# Altium PCB NBP8 Xilinx Virtex-II Pro BGA456 Rev1.01.PcbDoc (part 2 of 4)
Units mm, origin at the board's own origin, x right, y up, seen from the top; angles counter-clockwise.
Board outline 69 x 99.5 mm, 8 copper layers (Top Layer, InternalPlane1, InternalPlane2, MidLayer1, MidLayer2, MidLayer3, MidLayer4, Bottom Layer), stack 1.545 mm thick; 164 components, 314 nets, 1132 pads, 807 vias.
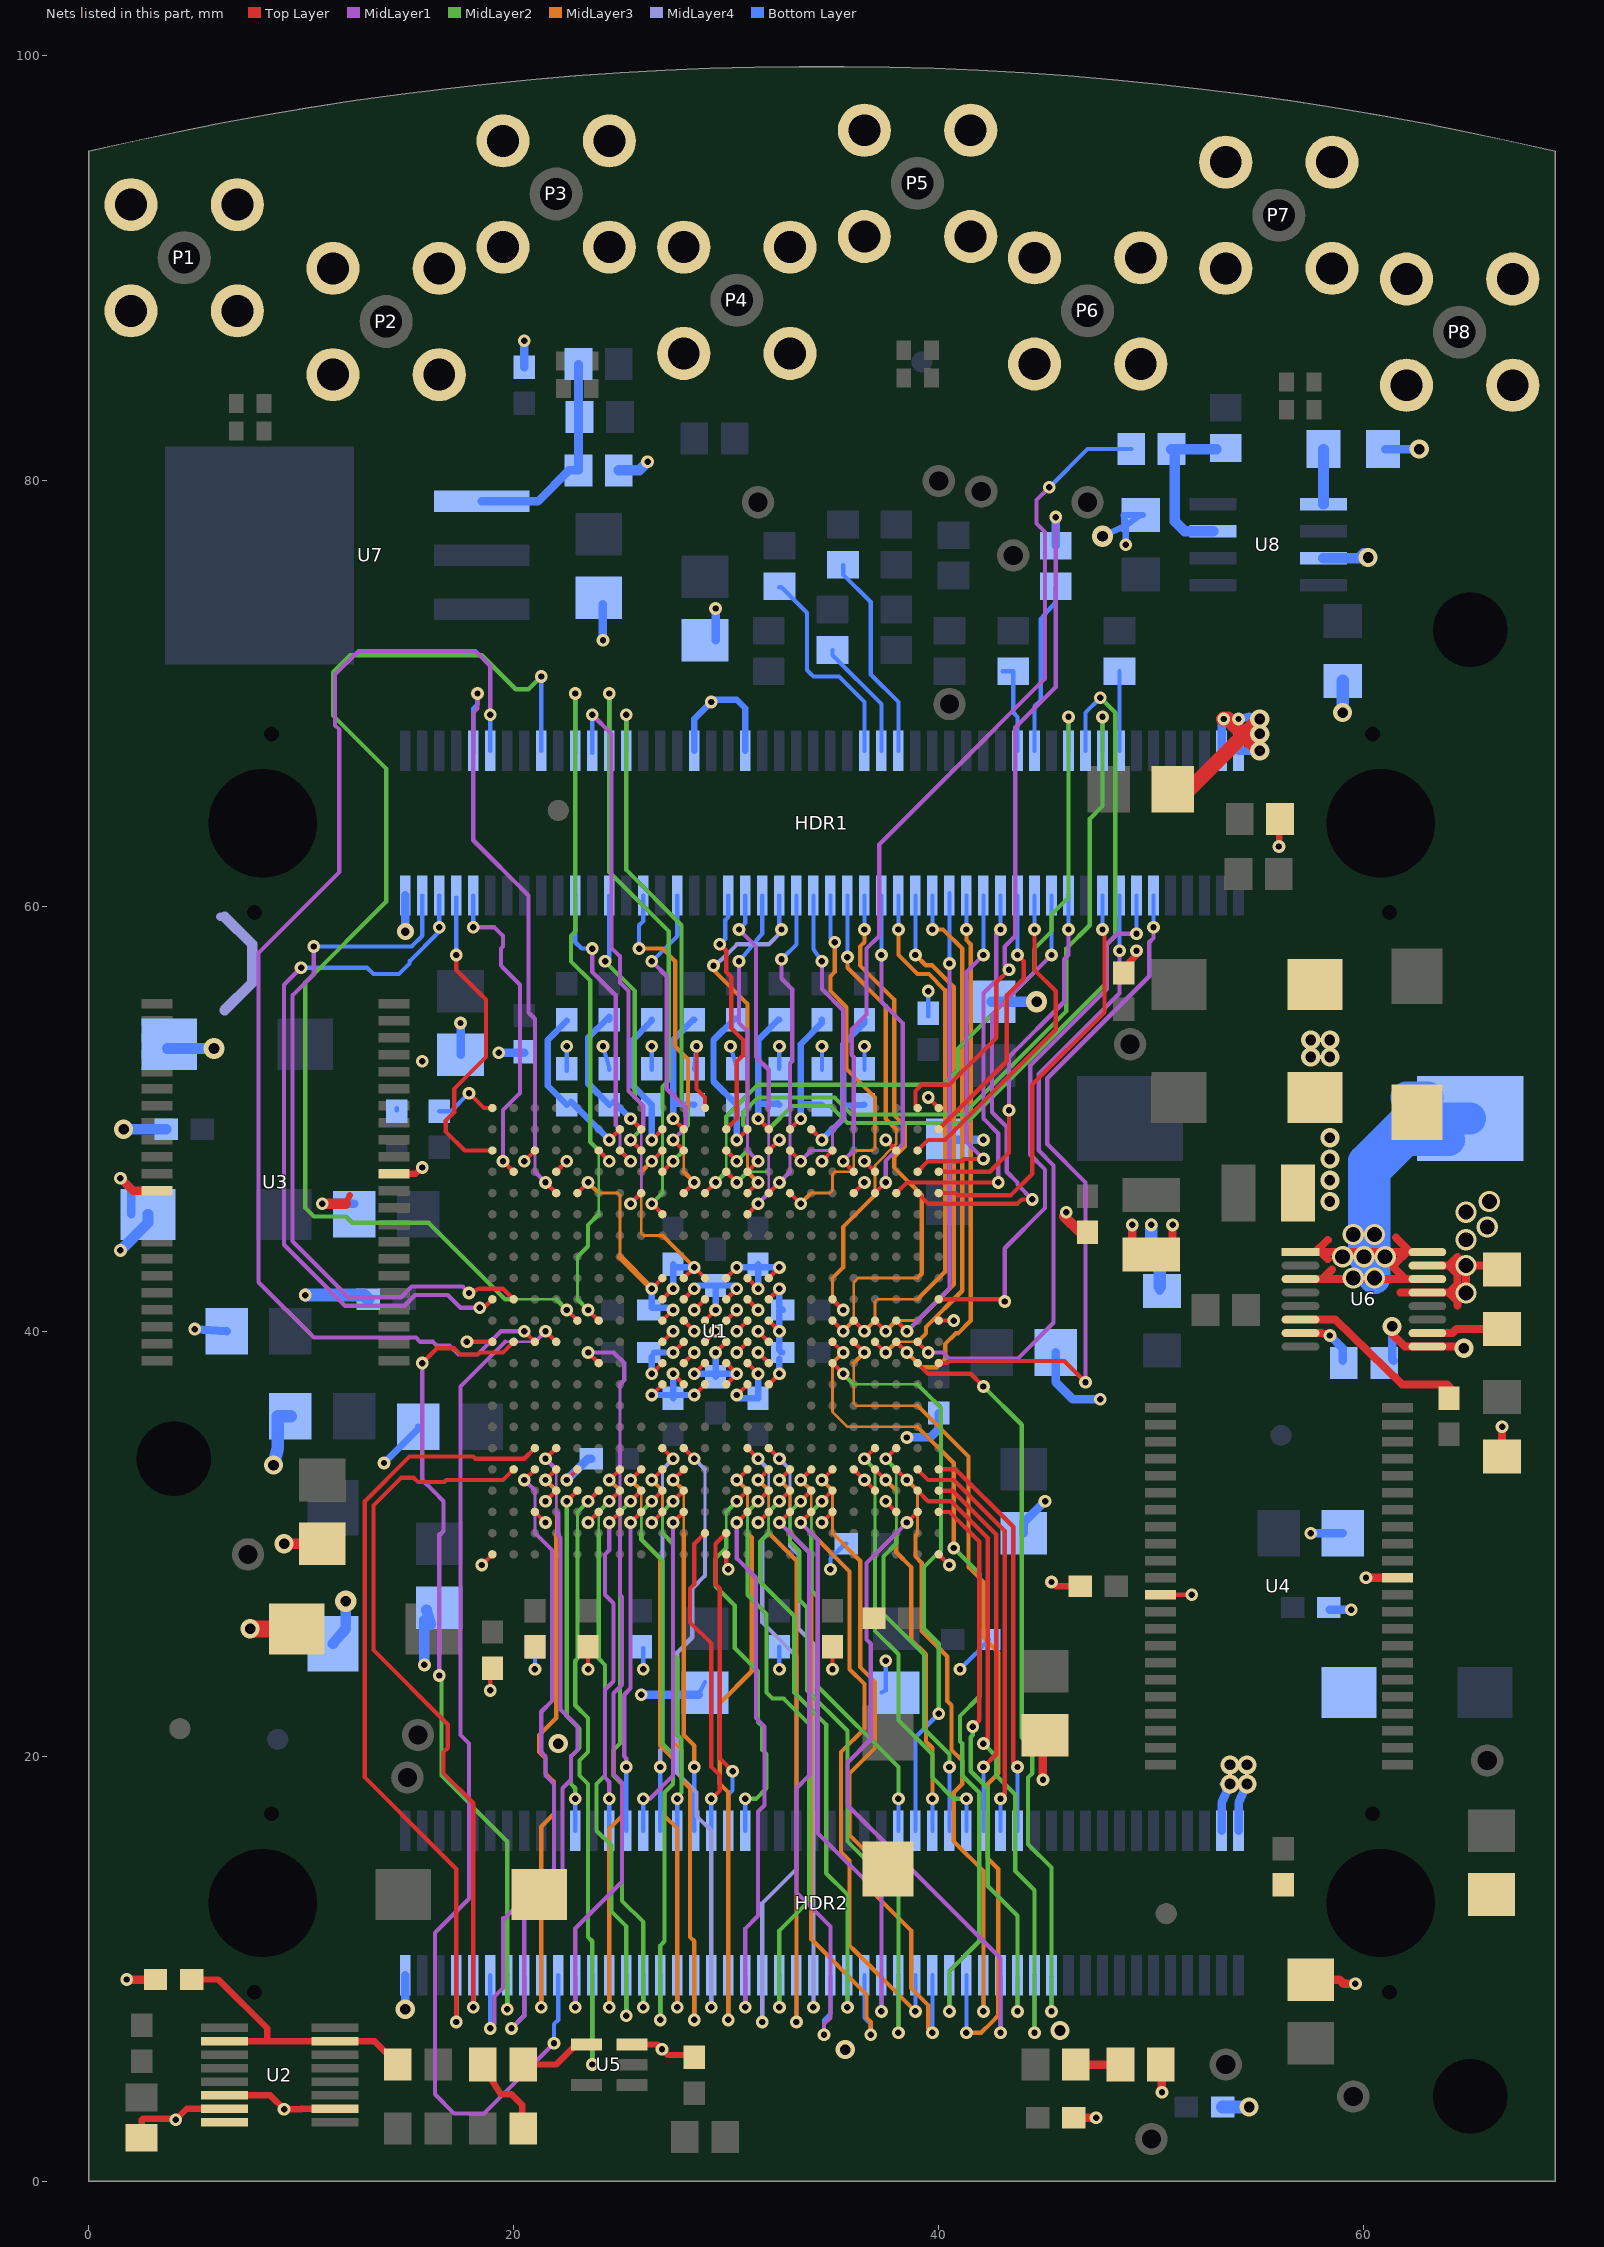
[diagram p8: the nets of this part, all layers, seen from the top]

## Via types
v1: diameter 0.6, hole 0.3, Top Layer to Bottom Layer, tented bottom, 695 vias
v2: diameter 0.9, hole 0.5, Top Layer to Bottom Layer, tented bottom, 45 vias
v3: diameter 1.8, hole 1, Top Layer to Bottom Layer, tented bottom, 26 vias
v4: diameter 1, hole 0.7, Top Layer to Bottom Layer, tented bottom, 17 vias
v5: diameter 1, hole 0.5, Top Layer to Bottom Layer, tented bottom, 15 vias
v6: diameter 1.5, hole 1, Top Layer to Bottom Layer, tented bottom, 4 vias
v7: diameter 0.8, hole 0.4, Top Layer to Bottom Layer, tented bottom, 3 vias
v8: diameter 0.9, hole 0.5, Top Layer to Bottom Layer, 2 vias

## Nets (pads, with @x,y where several pads share a name; then routed paths per layer and width w, separated by ;. In a path a pad name is that pad's centre, name@x,y a point inside that pad or via, vN(x,y) a via of type N, cw(c..) or ccw(c..) an arc to the next point about the centre after c; other vN are vias at no path point) (continued)
GND: C1.2 C2.2 C3.2 C4.2 C5.2 C6.2 C7.2 C9.2 C10.2 C11.2 C12.2 C13.2 C14.2 C15.2 C16.2 C17.2 C18.2 C19.2 C20.2 C21.2 C22.2 C23.2 C24.2 C25.2 C26.2 C27.2 C28.2 C29.2 C30.2 C31.2 C32.1 C33.2 C34.2 C35.2 C36.2 C37.2 C38.2 C39.2 C40.2 C41.2 C42.2 C43.2 C44.2 C45.2 C46.2 C47.2 C48.2 C49.2 C50.2 C51.2 C52.2 C53.2 C54.2 C55.2 C56.2 C57.2 C58.2 C59.2 C60.2 C61.2 C62.1 C63.1 C65.1 C66.1 C67.2 C76.2 C77.2 C78.2 C79.2 C80.1 C81.1 C82.1 C83.1 C84.1 C85.1 C86.1 C87.1 C88.2 C89.2 C90.2 C91.2 C92.1 C93.1 C94.2 HDR1.1 HDR1.36 HDR1.42 HDR1.98 HDR1.100 HDR2.1 HDR2.98 HDR2.100 LED1.2 P1.2 P2.2 P3.2 P4.2 P5.2 P6.2 P7.2 P8.2 R16.2 R18.1 R22.1 R25.2 U1.A1 U1.A11 U1.A22 U1.AB1 U1.AB12 U1.AB22 U1.C3 U1.C6 U1.C9 U1.C14 U1.C17 U1.C20 U1.D4 U1.D19 U1.E5 U1.E18 U1.J9 U1.J10 U1.J11 U1.J12 U1.J13 U1.J14 U1.K9 U1.K10 U1.K11 U1.K12 U1.K13 U1.K14 U1.L9 U1.L10 U1.L11 U1.L12 U1.L13 U1.L14 U1.L22 U1.M1 U1.M9 U1.M10 U1.M11 U1.M12 U1.M13 U1.M14 U1.N9 U1.N10 U1.N11 U1.N12 U1.N13 U1.N14 U1.P9 U1.P10 U1.P11 U1.P12 U1.P13 U1.P14 U1.V5 U1.V18 U1.W4 U1.W19 U1.Y3 U1.Y6 U1.Y9 U1.Y14 U1.Y17 U1.Y20 U2.6 U2.7 U2.8 U2.10 U3.12 U3.34 U4.12 U4.34 U5.3 U6.9 U6.13 U6.15 U8.3 | length 275.5
  Top Layer w0.2: v1(17.8,39.5) 18.8,39.5 U1.L22@19,39.5 ; v1(17.9,51.2) 18.6,50.5 U1.AB22@19,50.5 ; v1(18.5,29) U1.A22@19,29.5 ; v1(18.9,23.1) 18.9,24.15 C33.2@18.9,24.2 ; v1(20.5,48) U1.Y20@21,48.5 ; U1.C20@21,31.5 v1(21.5,31) ; v1(21.5,32) U1.D19@22,32.5 ; U1.W19@22,47.5 v1(22.5,48) ; v1(22.5,33) U1.E18@23,33.5 ; U1.V18@23,46.5 v1(23.5,47) ; v1(23.5,24.1) C78.2@23.5,25.15 ; v1(23.5,31) U1.C17@24,31.5 ; U1.Y17@24,48.5 v1(24.5,48) ; v1(26.5,31) U1.C14@27,31.5 ; v1(26.5,37) U1.J14@27,37.5 ; v1(26.5,38) U1.K14@27,38.5 ; v1(26.5,42) U1.P14@27,42.5 ; v1(26.5,48) U1.Y14@27,48.5 ; U1.L14@27,39.5 v1(27.5,40) ; U1.M14@27,40.5 v1(27.5,41) ; U1.N14@27,41.5 v1(27.5,42) ; v1(27.5,38) U1.J13@28,37.5 ; v1(27.5,39) U1.L13@28,39.5 ; U1.K13@28,38.5 v1(28.5,39) ; U1.M13@28,40.5 v1(28.5,40) ; U1.N13@28,41.5 v1(28.5,42) ; U1.P13@28,42.5 v1(28.5,43) U1.P12@29,42.5 ; v1(28.5,37) U1.J12@29,37.5 ; v1(28.5,38) U1.K12@29,38.5 ; v1(28.5,41) U1.N12@29,41.5 ; v1(28.6,53.4) 28.6,51.4 29,51 U1.AB12@29,50.5 ; U1.L12@29,39.5 v1(29.5,40) ; U1.M12@29,40.5 v1(29.5,41) ; v1(29.5,39) U1.L11@30,39.5 ; U1.A11@30,29.5 30,29.1 v1(30.1,28.8) ; U1.J11@30,37.5 v1(30.5,38) U1.K11@30,38.5 ; U1.M11@30,40.5 v1(30.5,41) ; U1.N11@30,41.5 v1(30.5,42) ; U1.P11@30,42.5 v1(30.5,43) ; v1(30.5,37) U1.J10@31,37.5 ; v1(30.5,39) U1.L10@31,39.5 ; v1(30.5,40) U1.M10@31,40.5 ; U1.K10@31,38.5 v1(31.5,38) ; U1.N10@31,41.5 v1(31.5,41) ; U1.P10@31,42.5 v1(31.5,42) ; v1(31.5,31) U1.C9@32,31.5 ; v1(31.5,39) U1.K9@32,38.5 ; v1(31.5,40) U1.L9@32,39.5 ; U1.J9@32,37.5 v1(32.5,38) ; U1.M9@32,40.5 v1(32.5,40) ; U1.N9@32,41.5 v1(32.5,42) ; U1.P9@32,42.5 v1(32.5,43) ; U1.Y9@32,48.5 v1(32.5,49) ; v1(34.5,31) U1.C6@35,31.5 ; v1(34.5,48) U1.Y6@35,48.5 ; v1(35,24.1) C79.2@35,25.15 ; U1.E5@36,33.5 v1(36.5,33) U1.D4@37,32.5 ; U1.V5@36,46.5 v1(36.5,47) ; v1(36.5,48) U1.W4@37,47.5 ; v1(37.5,32) U1.C3@38,31.5 ; v1(37.5,49) U1.Y3@38,48.5 ; v1(39.5,51) U1.AB1@40,50.5 ; U1.A1@40,29.5 v1(40.5,29) ; U1.M1@40,40.5 v1(40.7,40.5) ; C44.2@44.9,20.9 C44.2@45,21 ; U4.12@50.5,27.6 v1(51.9,27.6)
  Top Layer w0.3: R18.1@2.5,2.05 2.5,2.9 2.55,2.95 4.05,2.95 v1(4.1,2.9) 4.613,3.413 U2.7@6.4,3.413 ; U2.6@6.4,4.048 8.553,4.048 v1(9.2,3.4) 10,3.4 10.012,3.413 U2.10@11.6,3.413 ; 12.1,46 12.287,46.4 ; U3.34@14.375,47.4 15.4,47.4 v1(15.7,47.7) ; U5.3@25.57,6.441 26.759,6.441 v1(26.978,6.222) 27.25,5.95 C35.2@28.5,5.95 ; v1(45.3,28.2) 45.5,28 C27.2@46.65,28 ; C22.2@48.7,56.85 48.5,56.9 48.575,56.975 49.3,57.7 v1(49.3,57.9) ; v1(56,62.8) R16.2@56.05,64.1
  Top Layer w0.38: C62.1@49.1,43.8 v1(49.1,45) ; C62.1@51,43.9 v1(51,45) ; v2@61.3,40.2 61.3,39.9 61.922,39.278 U6.9@62.984,39.278 v2@64.622,39.278 ; 61.717,41.818 U6.13@62.984,41.818 64,41.818 ; U6.15@62.984,43.088 63.988,43.088 ; 64.4,41.2 64.4,41.417 ; C67.2@66.487,43.088 v4(64.8,43.088) ; C65.1@66.5,34.1 v1(66.5,35.5) ; 63.988,43.088 64.394,42.681 64.4,42.675 ; 63.988,43.088 64.394,43.494 64.4,43.5 v4@64.4,43.088 ; 63.988,43.088 v4@64.4,43.088 ; 64,41.818 64.4,41.417 ; 64,41.818 64.018,41.818 ; 64.018,41.818 v4@64.4,41.818 ; 64.018,41.818 64.4,42.2 ; 64.4,41.417 64.4,41.8 v4@64.4,41.818 ; v4@64.4,41.818 64.4,42.2 ; v4@64.4,41.818 64.518,41.818 64.65,41.95 64.8,42.1 v4(64.8,43.088) ; 64.4,42.2 64.4,42.675 ; 64.4,42.675 v4@64.4,43.088 ; v4@64.4,43.088 v4(64.8,43.088)
  Top Layer w0.4: v1(1.5,47.2) 2.1,46.6 U3.12@3.225,46.6 ; v1(1.8,9.5) C32.1@3.15,9.5 ; v1(44.9,18.9) C44.2@44.9,20.9 ; C13.2@46.4,3 v1(47.4,3) ; v1(50.5,4.2) LED1.2@50.5,5.5 ; C60.2@57.5,9.5 58.85,9.5 59.05,9.3 v1(59.6,9.3) ; v1(60.1,28.4) U4.34@61.575,28.4
  Top Layer w0.5: v2(9.2,30) C46.2@11,30 ; v1(11,46) 12.1,46 ; v1(46,45.6) 45.9,45.4 46.65,44.65 C25.2@47,44.65
  Top Layer w0.7: C90.2@51.5,65.4 51.7,65.4 54.35,68.05 ; v1(53.4,68.8) 53.6,68.8 53.85,68.55 54.35,68.05 ; v2(55.1,67.3) 54.7,67.7 54.35,68.05 ; v2(55.1,68.8) 54.75,68.45 54.35,68.05
  Top Layer w0.8: v2(7.6,26) C51.2@9.8,26
  MidLayer3 w0.127: 24,46.5 24.9,46.5 25,46.4 25,43.5 ; 26,47.5 26,44.6 26.1,44.5 27,44.5
  MidLayer3 w0.2: v1(23.5,47) 24,46.5 ; 26,47.5 v1(26.5,48) ; 27,44.5 v1(28.5,43)
  MidLayer3 w0.3: 25,43.5 v1(26.5,42)
  MidLayer4 w0.4: 6.2,59.5 6.4,59.5
  MidLayer4 w0.5: 6.4,55.1 7.7,56.4 7.7,58.2 6.4,59.5
  Bottom Layer w0.2: C34.2@14.5,50.4 C34.2@14.5,50.5 ; C4.2@16.5,50.35 17.05,50.35 v1(17.9,51.2) ; v1(21,24.1) C1.2@21,25.15 ; C81.1@22.5,52.25 C81.1@22.5,52.35 v1(22.5,53.4) ; v1(24.2,53.4) C80.1@24.5,52.35 C80.1@24.5,52.3 ; v1(26.1,24.1) C3.2@26.1,25.1 ; C82.1@26.5,52.3 C82.1@26.5,52.35 v1(26.5,53.4) ; C83.1@28.5,52.3 C83.1@28.5,52.35 v1(28.6,53.4) ; C37.2@28.7,22.9 28.8,23.1 C37.2@29,23.5 ; v1(30.2,53.4) C86.1@30.5,52.35 C86.1@30.5,52.3 ; v1(32.5,24.1) C6.2@32.5,25.15 ; C87.1@32.5,52.35 v1(32.5,53.4) ; C85.1@34.5,52.3 C85.1@34.5,52.35 v1(34.5,53.4) ; v1(34.9,28.8) 34.9,29.3 35.6,30 C23.2@35.65,30 ; C84.1@36.5,52.3 C84.1@36.5,52.35 v1(36.5,53.4) ; C48.2@37.3,23 37.5,23.1 v1(37.5,24.5) ; C5.2@39.5,54.8 C5.2@39.5,54.95 v1(39.5,56) ; v1(41,24.1) 41.7,24.8 C2.2@42.35,25.5 ; v2@53.3,18.7 v2(53.7,18.7) ; HDR2.100@54.1,16.4 HDR2.100@54.1,16.5
  Bottom Layer w0.3: v1(13.9,33.8) 15.5,35.4 C50.2@15.5,35.5 ; v1(26.5,37) C21.2@27.5,37 ; v1(26.5,38) C14.2@26.5,38.8 ; v1(26.5,42) 26.5,41.1 27.4,41.1 v1(27.5,41) ; C14.2@26.6,39 v1(27.5,39) ; C21.2@27.5,36.85 C21.2@27.5,37 ; v1(27.5,38) C21.2@27.5,37 ; v1(27.5,42) C19.2@27.5,43.15 ; C19.2@27.6,43 v1(28.5,43) ; v1(28.5,37) C21.2@27.5,37 ; v1(28.5,38) C12.2@29.4,38 ; v1(28.5,42) 28.65,42.15 C10.2@29.5,42.15 ; HDR1.36@28.5,67.3 28.5,68.8 v1(29.3,69.6) 29.4,69.7 30.5,69.7 30.9,69.3 HDR1.42@30.9,67.3 ; C12.2@29.5,37.85 C12.2@29.5,38 ; v1(29.5,39) C12.2@29.5,38 ; v1(29.5,41) C10.2@29.5,42.15 ; v1(30.5,37) 30.65,36.85 C20.2@31.5,36.85 v1(31.5,38) ; v1(30.5,38) C12.2@29.5,38 ; v1(30.5,42) 30.35,42.15 C10.2@29.5,42.15 ; v1(30.5,43) C18.2@31.5,43 ; v1(31.5,42) C18.2@31.5,43 ; C18.2@31.5,43.15 C18.2@31.5,43 ; v1(32.5,38) C9.2@32.5,38.7 ; C16.2@32.5,41 v1(32.5,40) 32.5,39.1 32.6,39 C9.2@32.65,39 ; v1(32.5,42) 32.5,41.15 C16.2@32.65,41 ; v1(32.5,43) C18.2@31.5,43 ; v5(47.7,77.4) C92.1@48.8,77.9 ; v1(48.8,77) C92.1@48.8,77.9 ; C92.1@49.6,78.4 C92.1@49.5,78.4 ; C92.1@48.8,77.9 48.731,78.246 48.7,78.4 C92.1@49.5,78.4 ; C92.1@48.8,77.9 C92.1@49.5,78.4
  Bottom Layer w0.4: v1(1.5,47.2) 2,46.7 C56.2@2,45.5 ; v1(5,40.1) C47.2@6.5,40 ; v1(10.2,41.7) 11.6,41.7 ; v1(11,46) C41.2@12.5,46 ; v2@14.9,8.2 HDR2.1@14.9,9.7 ; v7(14.9,58.8) HDR1.1@14.9,60.5 ; C89.2@17.5,53 v1(17.5,54.5) ; v1(19.3,53.1) C77.2@20.5,53.1 ; C17.2@20.5,85.35 v1(20.5,86.6) ; v1(22.5,33) 23.5,34 C24.2@23.65,34 ; v1(24.2,72.5) C59.2@24.2,74.2 ; v1(26,22.9) C37.2@28.7,22.9 ; C45.2@29.5,72.5 v1(29.5,74) ; v1(38.5,35) 39.6,35 40,35.4 C7.2@40,36.15 ; C43.2@40.5,49 v1(42.1,49) ; C40.2@44,30.5 44,31 v1(45,32) ; C39.2@45.5,39 45.5,37.6 46.3,36.8 v1(47.6,36.8) ; 50,43.9 50.4,43.5 C66.1@50.4,41.9 ; HDR2.98@53.3,16.5 53.3,17.8 v2(53.7,18.7) ; HDR1.98@53.3,67.3 53.3,68.6 53.45,68.75 53.6,68.9 v1(54.1,68.8) ; HDR2.100@54.1,16.5 54.1,17.8 v2(54.5,18.7) ; v2(55.1,67.3) HDR1.100@54.1,67.3 v1(54.1,68.8) ; v2(55.1,68.1) 54.785,68.603 54.74,68.675 54.6,68.9 v1(54.1,68.8) ; v1(57.5,30.5) C49.2@59,30.5 ; C15.2@58.4,26.9 v1(59.4,26.9) ; C94.2@61,81.5 v2(62.6,81.5) ; v2(61.329,40.229) 61.329,38.671 R22.1@61.4,38.6
  Bottom Layer w0.5: v1(1.5,43.8) 2.8,45.1 C56.2@2.8,45.5 ; v2(1.65,49.5) 3.3,49.5 C26.2@3.65,49.5 ; C91.2@3.7,53.3 3.8,53.3 v5(5.9,53.3) ; C54.2@11.5,25.3 12.1,26 v5(12.1,27.3) ; v1(15.8,24.3) 15.8,26.4 16.008,26.262 16.1,26.2 15.919,26.834 C42.2@15.9,26.9 ; R25.2@24.95,80.5 25.9,80.5 v1(26.3,80.9) ; C38.2@42.5,55.5 v5(44.6,55.5) ; U8.3@58.1,76.365 59.765,76.365 60,76.6 v2(60.2,76.4)
  Bottom Layer w0.6: v2(8.7,33.7) 8.9,34.5 8.9,36 C36.2@9.5,36 ; v1(10.2,41.7) 12.95,41.7 C29.2@13.15,41.5 ; v1(50,45) 50,43.9 50.4,43.5 C66.1@50.4,42.1 ; C28.2@53.35,3.5 v2(54.6,3.5) ; v2(59,69.1) C93.1@59,70.6
  other v1: 15.7,52.7
  other v2: 35.6,6.2 45.7,7.1 14.9,8.1 53.7,19.6 54.5,19.6 22.1,20.6 64.7,39.2 58.4,46.1 58.4,47.1 58.4,48.1 58.4,49.1 57.5,52.9 58.4,52.9 57.5,53.7 58.4,53.7
  other v4: 64.8,41.8 64.8,44.3 65.8,44.9 64.8,45.6 65.9,46.1
GREEN0: HDR1.10 U1.V19 | length 28.1
  Top Layer w0.2: v1(21.5,47) U1.V19@22,46.5
  MidLayer1 w0.127: 21,47.5 21,48.5
  MidLayer1 w0.2: v1(18.3,70) 18.3,69.3 18.1,69.1 18.1,63.1 20.7,60.5 20.7,55 21,54.7 21,48.5 ; 21,47.5 v1(21.5,47)
  Bottom Layer w0.2: HDR1.10@18.1,67.2 HDR1.10@18.1,67.3 18.1,69.3 18.3,69.5 v1(18.3,70)
GREEN1: HDR1.12 U1.L20 | length 57.4
  Top Layer w0.2: v1(20.5,40) U1.L20@21,39.5
  MidLayer1 w0.2: v1(18.9,69) 18.9,71.3 18.2,72 12.7,72 11.6,70.9 11.6,68.5 11.8,68.3 11.8,61.6 8,57.8 8,42.3 10.6,39.7 15.4,39.7 15.6,39.5 16.2,39.5 16.386,39.314 16.986,39.314 17.4,38.9 18.3,38.9 19.4,40 v1(20.5,40)
  Bottom Layer w0.2: HDR1.12@18.9,67.3 v1(18.9,69)
HDRIVE: HDR1.18 U1.M18 | length 57.3
  Top Layer w0.2: v1(22.5,41) U1.M18@23,40.5
  MidLayer2 w0.127: 20,41.5 22,41.5
  MidLayer2 w0.2: 20,41.5 19.6,41.5 16,45.1 12.4,45.1 12.1,45.4 10.6,45.4 10.2,45.8 10.2,56.4 14,60.2 14,66.466 11.5,68.966 11.5,71 12.1,71.6 12.3,71.8 18.5,71.8 20.1,70.2 20.7,70.2 v1(21.3,70.8) ; 22,41.5 v1(22.5,41)
  Bottom Layer w0.2: HDR1.18@21.3,67.3 21.3,70 v1(21.3,70.8)
IO0: HDR2.7 U1.F20 | length 37.6
  Top Layer w0.2: v1(17.3,7.5) 17.3,14.7 16.379,15.621 13,19 13,32 15.1,34.1 18.1,34.1 18.2,34 20.5,34 U1.F20@21,34.5
  Bottom Layer w0.2: v1(17.3,7.5) HDR2.7@17.3,9.7
IO1: HDR2.9 U1.E21 | length 34.7
  Top Layer w0.2: v1(18.1,8.2) 18.1,17.8 16.7,19.2 16.7,20.2 16.9,20.4 16.9,21.5 13.4,25 13.4,31.8 14.7,33.1 15.3,33.1 15.5,32.9 16.732,32.9 16.832,33 19.5,33 U1.E21@20,33.5
  Bottom Layer w0.2: v1(18.1,8.2) HDR2.9@18.1,9.7
IO2: HDR2.11 U1.E20 | length 31.3
  Top Layer w0.2: v1(20.5,33) U1.E20@21,33.5
  MidLayer1 w0.127: 21,30.5 21,32.5
  MidLayer1 w0.2: v1(18.9,7.2) 19.1,7.4 19.1,8.7 19.5,9.1 19.5,12.4 ; 19.5,12.3 21.9,14.7 21.9,18.7 21.5,19.1 21.5,20 21.3,20.2 21.3,22.1 21.8,22.6 21.8,29.7 21,30.5 ; v1(20.5,33) 21,32.5
  Bottom Layer w0.2: v1(18.9,7.2) HDR2.11@18.9,9.7
IO3: HDR2.13 U1.L21 | length 38.8
  Top Layer w0.2: v1(15.7,38.5) 16.4,39.2 17.2,39.2 17.5,38.9 18.3,38.9 18.4,39 19.5,39 U1.L21@20,39.5
  MidLayer1 w0.2: v1(15.7,38.5) 15.7,33 16.2,32.5 16.7,32 16.7,30.6 16.5,30.4 v1(16.5,23.8)
  MidLayer2 w0.2: v1(16.5,23.8) 16.6,23.7 16.6,19.1 19.7,16 v1(19.7,8.1)
  Bottom Layer w0.2: v1(19.7,8.1) HDR2.13@19.7,9.7
IO4: HDR2.15 U1.F19 | length 32.2
  Top Layer w0.2: v1(21.5,34) U1.F19@22,34.5
  MidLayer1 w0.127: 22,31.5 22,33.5
  MidLayer1 w0.2: v1(19.9,7.2) 20.5,7.8 20.5,12.4 22.3,14.2 22.3,18.5 22.7,18.9 22.7,20 23,20.3 23,21.4 22.2,22.2 22.2,30.3 22.1,30.4 22.1,31.4 22,31.5 ; v1(21.5,34) 22,33.5
  Bottom Layer w0.2: v1(19.9,7.2) 20.5,7.8 HDR2.15@20.5,9.7
IO5: HDR2.17 U1.E19 | length 28.1
  Top Layer w0.2: v1(21.5,33) U1.E19@22,33.5
  MidLayer3 w0.127: 22,30.5 22,32.5
  MidLayer3 w0.2: v1(21.3,8.2) 21.3,16.7 21.9,17.3 21.9,18.8 21.5,19.2 21.5,19.9 21.2,20.2 21.2,21 22,21.8 22,30.5 ; v1(21.5,33) 22,32.5
  Bottom Layer w0.2: v1(21.3,8.2) HDR2.17@21.3,9.7
IO6: HDR2.19 U1.L19 | length 50.5
  Top Layer w0.2: v1(21.5,40) U1.L19@22,39.5
  MidLayer1 w0.127: 19.6,39.5 21,39.5
  MidLayer1 w0.2: 19.6,39.5 17.5,37.4 17.5,21 17.9,20.6 17.9,13.3 16.3,11.7 16.3,4.1 17.2,3.2 18.6,3.2 v1(21.9,6.5) ; 21,39.5 v1(21.5,40)
  Bottom Layer w0.2: v1(21.9,6.5) 21.9,7.4 22.1,7.6 HDR2.19@22.1,9.7
IO7: HDR2.21 U1.K17 | length 35.8
  Top Layer w0.2: v1(23.5,39) U1.K17@24,38.5
  MidLayer1 w0.127: 25,30.5 25,33.5 ; 25,34.5 25,37.5
  MidLayer1 w0.2: v1(22.9,8.2) 22.9,11.9 25.1,14.1 25.1,18.766 24.7,19.166 24.7,22.966 25.1,23.366 25.1,27.5 25,27.6 25,30.5 ; v1(23.5,39) 24.7,39 25.2,38.5 25.2,37.7 25,37.5 ; 25,33.5 25,34.5
  Bottom Layer w0.2: v1(22.9,8.2) HDR2.21@22.9,9.7
IO8: HDR2.23 U1.D17 | length 32.3
  Top Layer w0.2: v1(23.5,32) U1.D17@24,32.5
  MidLayer2 w0.127: 23,30.5 23,31.5
  MidLayer2 w0.2: 23,30.5 23,24.6 22.9,24.5 22.9,22.4 23.5,21.8 23.5,20.2 23.1,19.8 23.1,19.1 23.5,18.7 23.5,11.5 23.7,11.3 v1(23.7,5.5) ; 23,31.5 v1(23.5,32)
  Bottom Layer w0.2: v1(23.7,5.5) HDR2.23@23.7,9.7
IO9: HDR2.25 U1.E16 | length 27.8
  Top Layer w0.2: v1(24.5,33) U1.E16@25,33.5
  MidLayer3 w0.127: 25,30.5 25,32.5
  MidLayer3 w0.2: v1(24.5,8.2) 24.5,16.6 25.1,17.2 25.1,18.7 24.7,19.1 24.7,20.3 25,20.6 25,30.5 ; v1(24.5,33) 25,32.5
  Bottom Layer w0.2: v1(24.5,8.2) HDR2.25@24.5,9.7
IO10: HDR2.27 U1.D16 | length 27.9
  Top Layer w0.2: v1(24.5,32) U1.D16@25,32.5
  MidLayer2 w0.127: 24,30.5 24,31.5
  MidLayer2 w0.2: 24,30.5 24,24.6 24.3,24.3 24.3,19.1 23.9,18.7 23.9,16.5 24.6,15.8 24.6,12.7 25.3,12 v1(25.3,7.8) ; 24,31.5 v1(24.5,32)
  Bottom Layer w0.2: v1(25.3,7.8) 25.3,8.2 HDR2.27@25.3,9.7
IO11: HDR2.29 U1.D15 | length 26.9
  Top Layer w0.2: v1(25.5,32) U1.D15@26,32.5
  MidLayer2 w0.127: 25,30.5 25,31.5
  MidLayer2 w0.2: 25,30.5 25,20.6 24.7,20.3 24.7,19.1 25.1,18.7 25.1,13.2 26.1,12.2 v1(26.1,8.2) ; 25,31.5 v1(25.5,32)
  Bottom Layer w0.2: v1(26.1,8.2) HDR2.29@26.1,9.7
IO12: HDR2.31 U1.D14 | length 28.3
  Top Layer w0.2: v1(26.5,32) U1.D14@27,32.5
  MidLayer2 w0.127: 26,30.5 26,31.5
  MidLayer2 w0.2: 26,30.5 26,30.2 27,29.2 27,20.6 27.5,20.1 27.5,18.7 27.1,18.3 27.1,11.3 26.9,11.1 v1(26.9,7.6) ; 26,31.5 v1(26.5,32)
  Bottom Layer w0.2: v1(26.9,7.6) HDR2.31@26.9,9.7
IO13: HDR2.33 U1.E15 | length 28.2
  Top Layer w0.2: v1(25.5,33) U1.E15@26,33.5
  MidLayer3 w0.127: 26,30.5 26,32.5
  MidLayer3 w0.2: v1(25.5,33) 26,32.5 ; 26,30.5 26,30.2 26.9,29.3 26.9,20.5 27.5,19.9 27.5,18.7 27.1,18.3 27.1,17.2 27.7,16.6 v1(27.7,8.2)
  Bottom Layer w0.2: v1(27.7,8.2) HDR2.33@27.7,9.7
IO14: HDR2.35 U1.E14 | length 29
  Top Layer w0.2: v1(26.5,33) U1.E14@27,33.5
  MidLayer3 w0.127: 27,30.5 27,32.5
  MidLayer3 w0.2: v1(26.5,33) 27,32.5 ; 27,30.5 27.5,30 27.5,20.7 27.9,20.3 27.9,18.9 28.3,18.5 28.3,11.5 28.5,11.3 v1(28.5,7.6)
  Bottom Layer w0.2: v1(28.5,7.6) HDR2.35@28.5,9.7
IO15: HDR2.37 U1.F13 | length 29.4
  Top Layer w0.2: U1.F13@28,34.5 v1(28.5,34)
  MidLayer4 w0.127: 29,30.5 29,33.5
  MidLayer4 w0.2: v1(28.5,34) 29,33.5 ; 29,30.5 29,28.5 28.4,27.9 28.4,25.6 27.7,24.9 27.7,19.2 28.6,18.3 28.6,17.2 29.3,16.5 v1(29.3,8.2)
  Bottom Layer w0.2: v1(29.3,8.2) HDR2.37@29.3,9.7
IO16: HDR2.39 U1.E10 | length 29.3
  Top Layer w0.2: v1(30.5,33) U1.E10@31,33.5
  MidLayer3 w0.127: 31,30.5 31,32.5
  MidLayer3 w0.2: v1(30.1,7.6) 30.1,18.3 29.7,18.7 29.7,22.5 31.2,24 31.2,30.3 31,30.5 ; v1(30.5,33) 31,32.5
  Bottom Layer w0.2: v1(30.1,7.6) HDR2.39@30.1,9.7
IO17: HDR2.41 U1.C10 | length 25.9
  Top Layer w0.2: v1(30.5,31) U1.C10@31,31.5
  MidLayer1 w0.2: v1(30.5,31) 30.5,29.3 31.4,28.4 31.4,21.8 31.8,21.4 31.8,17.7 31.5,17.4 31.5,12.5 30.9,11.9 v1(30.9,8.2)
  Bottom Layer w0.2: v1(30.9,8.2) HDR2.41@30.9,9.7
IO18: HDR2.43 U1.F10 | length 31.1
  Top Layer w0.2: U1.F10@31,34.5 v1(31.5,34)
  MidLayer4 w0.127: 32,30.5 32,33.5
  MidLayer4 w0.2: v1(31.5,34) 32,33.5 ; v1(31.7,7.5) 31.7,13.1 33.3,14.7 33.3,24.7 31.7,26.3 31.7,30.2 32,30.5
  Bottom Layer w0.2: v1(31.7,7.5) HDR2.43@31.7,9.7
IO19: HDR2.45 U1.D9 | length 28.3
  Top Layer w0.2: v1(31.5,32) U1.D9@32,32.5
  MidLayer2 w0.127: 31,30.5 31,31.5
  MidLayer2 w0.2: 31,30.5 31,27.6 31.9,26.7 31.9,23 32.179,22.721 32.7,22.721 33.9,21.521 33.9,13.2 33.379,12.679 32.5,11.8 v1(32.5,8.2) ; 31,31.5 v1(31.5,32)
  Bottom Layer w0.2: v1(32.5,8.2) HDR2.45@32.5,9.7
IO20: HDR2.47 U1.E9 | length 29.1
  Top Layer w0.2: v1(31.5,33) U1.E9@32,33.5
  MidLayer3 w0.127: 32,30.5 32,32.5
  MidLayer3 w0.2: v1(31.5,33) 32,32.5 ; 32,30.5 32.707,29.793 33.3,29.2 v1(33.3,7.5)
  Bottom Layer w0.2: v1(33.3,7.5) HDR2.47@33.3,9.6
IO21: HDR2.49 U1.F9 | length 28.7
  Top Layer w0.2: U1.F9@32,34.5 v1(32.5,34)
  MidLayer4 w0.127: 33,30.5 33,33.5
  MidLayer4 w0.2: v1(32.5,34) 33,33.5 ; 33,30.5 33,29.9 33.4,29.5 33.4,26 34.1,25.3 v1(34.1,8.2)
  Bottom Layer w0.2: v1(34.1,8.2) HDR2.49@34.1,9.7
IO22: HDR2.51 U1.C8 | length 29.3
  Top Layer w0.2: v1(32.5,31) U1.C8@33,31.5
  MidLayer1 w0.2: v1(32.5,31) 33.9,29.6 33.9,19.1 33.3,18.5 33.3,13.6 34.9,12 34.9,7.7 34.6,7.4 v1(34.6,6.9)
  Bottom Layer w0.2: v1(34.6,6.9) 34.6,7.6 34.9,7.9 HDR2.51@34.9,9.7
IO23: HDR2.53 U1.D8 | length 28.3
  Top Layer w0.2: v1(32.5,32) U1.D8@33,32.5
  MidLayer2 w0.127: 32,30.5 32,31.5
  MidLayer2 w0.2: 32,27.8 32.047,27.753 ; 32,30.5 31.6,30.1 31.6,28.2 32.047,27.753 ; 32,31.5 v1(32.5,32) ; v1(35.7,8.2) 35.7,13.5 34.7,14.5 34.7,21.5 33.2,23 33.2,26.6 32.047,27.753
  Bottom Layer w0.2: v1@35.7,8 v1(35.7,8.2) HDR2.53@35.7,9.7
IO24: HDR2.55 U1.E8 | length 31.5
  Top Layer w0.2: v1(32.5,33) U1.E8@33,33.5
  MidLayer3 w0.127: 33,30.5 33,32.5
  MidLayer3 w0.2: v1(32.5,33) 33,32.5 ; 33,30.5 34,29.5 34,11.4 36.6,8.8 36.6,7.7 36.8,7.5 v1(36.8,6.9)
  Bottom Layer w0.2: HDR2.55@36.5,9.7 36.5,7.7 36.8,7.4 v1(36.8,6.9)
IO25: HDR2.57 U1.C7 | length 27
  Top Layer w0.2: v1(33.5,31) U1.C7@34,31.5
  MidLayer1 w0.2: v1(33.5,31) 34.3,30.2 34.3,16.4 37.3,13.4 v1(37.3,8)
  Bottom Layer w0.2: v1(37.3,8) HDR2.57@37.3,9.7
IO26: HDR2.59 U1.D7 | length 30.7
  Top Layer w0.2: v1(33.5,32) U1.D7@34,32.5
  MidLayer2 w0.127: 33,30.5 33,31.5
  MidLayer2 w0.2: 33,30.5 33,30.1 33.449,29.651 33.449,27.351 33.8,27 33.8,23.1 35.7,21.2 35.7,16 38.1,13.6 v1(38.1,7) ; 33,31.5 v1(33.5,32)
  Bottom Layer w0.2: v1(38.1,7) HDR2.59@38.1,9.7
IO27: HDR2.61 U1.E7 | length 30.6
  Top Layer w0.2: v1(33.5,33) U1.E7@34,33.5
  MidLayer3 w0.127: 34,30.5 34,32.5
  MidLayer3 w0.2: v1(33.5,33) 34,32.5 ; 34,30.5 35.8,28.7 35.8,24.1 36.5,23.4 36.5,21.3 35.4,20.2 35.4,15.5 35.8,15.1 35.8,11.1 36.048,10.852 v1(38.9,8)
  Bottom Layer w0.2: v1(38.9,8) HDR2.61@38.9,9.7
IO28: HDR2.63 U1.E6 | length 32.6
  Top Layer w0.2: v1(34.5,33) U1.E6@35,33.5
  MidLayer3 w0.127: 35,30.5 35,32.5
  MidLayer3 w0.2: v1(34.5,33) 35,32.5 ; 35,30.5 36.3,29.2 36.3,24.2 37,23.5 37,20.4 35.8,19.2 35.8,16.3 37.1,15 37.1,13.4 38.7,11.8 38.7,9.1 39.5,8.3 39.5,7.2 v1(39.7,7)
  Bottom Layer w0.2: v1(39.7,7) HDR2.63@39.7,9.7
IO29: HDR2.65 U1.L6 | length 39.8
  Top Layer w0.2: U1.L6@35,39.5 v1(35.5,39)
  MidLayer2 w0.2: v1(40.5,8) 40.5,9.9 41.9,11.3 41.9,18.3 41.1,19.1 41.1,20.6 41,20.7 41,21.9 41.9,22.8 41.9,28.6 v1(40.7,29.8) ; v1@40.6,29.8 v1@40.65,29.75
  MidLayer3 w0.127: 35,38.5 35,36.2 35.7,35.5 39,35.5
  MidLayer3 w0.2: 35,38.5 v1(35.5,39) ; 39,35.5 40.7,33.8 v1(40.7,29.8)
  Bottom Layer w0.2: v1(40.5,8) HDR2.65@40.5,9.7
IO30: HDR2.67 U1.L5 | length 41.7
  Top Layer w0.2: U1.L5@36,39.5 v1(36.5,39)
  MidLayer3 w0.127: 36,38.5 36,36.6 36.1,36.5 39,36.5
  MidLayer3 w0.2: 36,38.5 v1(36.5,39) ; 39,36.5 41.4,34.1 41.4,28.9 42.1,28.2 42.1,25.6 42.8,24.9 42.8,19.2 42.3,18.7 42.3,15.2 42.8,14.7 42.8,7.8 42.5,7.5 42,7 v1(41.3,7) v1@41.2,7
  Bottom Layer w0.2: v1(41.3,7) HDR2.67@41.3,9.7
IO31: HDR2.69 U1.E3 | length 29.2
  Top Layer w0.2: U1.E3@38,33.5 v1(38.5,33)
  MidLayer3 w0.127: 39,30.5 39,32.5
  MidLayer3 w0.2: v1(38.5,33) 39,32.5 ; 39,30.5 38.9,30.4 38.9,29.4 39.2,29.1 39.2,25.9 40.4,24.7 40.4,22.6 40.6,22.4 40.6,20.3 41.1,19.8 41.1,18.7 40.7,18.3 40.7,16 42.1,14.6 v1(42.1,8)
  Bottom Layer w0.2: v1(42.1,8) HDR2.69@42.1,9.6
IO32: HDR2.71 U1.C2 | length 31.7
  Top Layer w0.2: v1(38.5,31) U1.C2@39,31.5
  MidLayer1 w0.2: v1(38.5,31) 36.6,29.1 36.6,25.5 36.8,25.3 36.8,20.8 35.7,19.7 35.7,17.7 42.9,10.5 v1(42.9,7)
  Bottom Layer w0.2: v1(42.9,7) HDR2.71@42.9,9.7
IO33: HDR2.73 U1.C1 | length 27.3
  Top Layer w0.2: U1.C1@40,31.5 40.503,31.5 41.9,30.103 41.9,21.7 v1(41.6,21.4)
  MidLayer2 w0.2: v1(41.6,21.4) 41.6,21 41.5,20.9 41.5,19.3 42.3,18.5 42.3,13.9 43.7,12.5 v1(43.7,8)
  Bottom Layer w0.2: v1(43.7,8) HDR2.73@43.7,9.6
IO34: HDR2.75 U1.D2 | length 31.3
  Top Layer w0.2: U1.D2@39,32.5 39.5,32 40.569,32 42.3,30.269 42.3,20.8 v1(42.1,20.6)
  MidLayer2 w0.2: v1(42.1,20.6) 42.7,20 42.7,19.1 43.6,18.2 43.6,14.6 44.5,13.7 v1(44.5,7)
  Bottom Layer w0.2: v1(44.5,7) HDR2.75@44.5,9.7
IO35: HDR2.77 U1.K2 | length 36
  Top Layer w0.2: U1.K2@39,38.5 39.5,38 41.5,38 v1(42.1,37.4)
  MidLayer2 w0.2: v1(42.1,37.4) 43.9,35.6 43.9,20.9 44.4,20.4 44.4,19.2 44.2,19 44.2,15.866 45.3,14.766 v1(45.3,8)
  Bottom Layer w0.2: v1(45.3,8) HDR2.77@45.3,9.6
JIOA0: HDR1.3 U1.N21 | length 33.6
  Top Layer w0.2: v1(17.9,41.8) 18.4,42 19.5,42 U1.N21@20,41.5
  MidLayer1 w0.2: v1(10.6,58.1) 10.6,56.8 9.6,55.8 9.6,44.231 12.231,41.6 14.7,41.6 15.2,42.1 17.6,42.1 v1(17.9,41.8)
  Bottom Layer w0.2: v1(10.6,58.1) 15.2,58.1 15.7,58.6 HDR1.3@15.7,60.5
JIOA1: HDR1.5 U1.N22 | length 34.2
  Top Layer w0.2: v1(18.4,41.1) 18.6,41.1 U1.N22@19,41.5
  MidLayer1 w0.2: v1(10,57.1) 9.2,56.3 9.2,44.066 12.066,41.2 14.866,41.2 15.366,41.7 16.9,41.7 17.5,41.1 v1(18.4,41.1)
  Bottom Layer w0.2: v1(10,57.1) 13.1,57.1 13.4,56.8 14.6,56.8 15.1,57.3 15.1,57.4 16.5,58.8 v1(16.5,59) HDR1.5@16.5,60.5
JIOA2: HDR1.7 U1.Y22 | length 14.9
  Top Layer w0.2: v1(17.3,57.7) 17.3,57 18.4,55.9 18.7,55.6 18.7,52.9 17.2,51.4 17.2,50.3 16.8,49.9 16.8,49.4 17.7,48.5 U1.Y22@19,48.5
  Bottom Layer w0.2: v1(17.3,57.7) HDR1.7@17.3,60.4
JIOA3: HDR1.9 U1.W21 | length 15.1
  Top Layer w0.2: v1(19.5,48) U1.W21@20,47.5
  MidLayer1 w0.2: v1(18.1,59) 19.1,59 19.5,58.6 19.5,58.1 19.4,58 19.4,57.2 19.5,57.1 20.3,56.3 20.3,51.2 19.5,50.4 v1(19.5,48)
  Bottom Layer w0.2: v1(18.1,59) HDR1.9@18.1,60.5
JIOB0: HDR1.83 U1.V1 | length 19.4
  Top Layer w0.2: U1.V1@40,46.5 40.8,46.5 40.9,46.4 43.4,46.4 44.4,47.4 44.4,51.6 47.8,55 v1@47.8,58.9
  Bottom Layer w0.2: v1(47.7,58.9) HDR1.83@47.7,60.5
JIOB1: HDR1.85 U1.L2 | length 29.4
  Top Layer w0.2: U1.L2@39,39.5 v1(39.5,39)
  MidLayer1 w0.2: v1(39.5,39) 40.2,39 40.5,38.7 43.7,38.7 45.4,40.4 45.4,47.8 44.7,48.5 44.7,52.1 48.5,55.9 v1(48.5,57.9)
  Bottom Layer w0.2: v1(48.5,57.9) HDR1.85@48.5,60.5
JIOB2: HDR1.87 U1.N1 | length 25.9
  Top Layer w0.2: U1.N1@40,41.5 42.9,41.5 43,41.4 v1(43.1,41.4)
  MidLayer1 w0.2: v1(43.1,41.4) 43.1,43.9 45,45.8 45,47.6 44.3,48.3 44.3,52.5 47.9,56.1 47.9,58.2 48.4,58.7 v1(49.3,58.7)
  Bottom Layer w0.2: v1(49.3,58.7) HDR1.87@49.3,60.5
JIOB3: HDR1.89 U1.K1 | length 33.4
  Top Layer w0.2: U1.K1@40,38.5 40.4,38.5 40.5,38.6 45.9,38.6 v1(46.9,37.6) v1@47,37.5
  MidLayer1 w0.2: v1(46.9,37.6) 46.9,47 45.1,48.8 45.1,51.9 49.9,56.7 49.9,58.3 50.1,58.5 v1(50.1,59) v1@50.2,58.9
  Bottom Layer w0.2: v1(50.1,59) HDR1.89@50.1,60.5
KBCLOCK: HDR1.22 U1.M17 | length 33.7
  Top Layer w0.2: v1(23.5,41) U1.M17@24,40.5
  MidLayer2 w0.127: 23,41.5 23,43.5 ; 24,45.5 24,48.5
  MidLayer2 w0.2: v1(22.9,70) 22.9,58.8 22.7,58.6 22.7,57.4 23.6,56.5 23.6,48.9 24,48.5 ; 23,41.5 v1(23.5,41) ; 23,43.5 23.5,44 23.5,45 24,45.5
  Bottom Layer w0.2: HDR1.22@22.9,67.2 HDR1.22@22.9,67.3 v1(22.9,70)
KBDATA: HDR1.24 U1.V15 | length 26.7
  Top Layer w0.2: v1(25.5,46) U1.V15@26,46.5
  MidLayer1 w0.127: 26,46.5 26,49.5
  MidLayer1 w0.2: v1(23.7,69) 24.6,68.1 24.6,58.034 25,57.634 25,56.4 25.4,56 25.4,51.3 26.1,50.6 26.1,49.6 26,49.5 ; v1(25.5,46) 26,46.5
  Bottom Layer w0.2: HDR1.24@23.7,67.2 HDR1.24@23.7,67.3 v1(23.7,69)
LCD_BCKL: HDR2.22 U1.D18 | length 16.7
  Top Layer w0.2: v1(22.5,32) U1.D18@23,32.5
  MidLayer2 w0.2: v1(22.5,32) 22.5,21.9 23.1,21.3 23.1,20.4 22.7,20 22.7,18.7 22.9,18.5 v1(22.9,18)
  Bottom Layer w0.2: HDR2.22@22.9,16.5 v1(22.9,18)
LCD_E: HDR2.26 U1.C16 | length 15.7
  Top Layer w0.2: v1(24.5,31) U1.C16@25,31.5
  MidLayer1 w0.2: v1(24.5,18) 24.5,18.8 24.3,19 24.3,23.131 24.7,23.531 24.7,27.2 24.3,27.6 24.3,29.5 24.5,29.7 v1(24.5,31)
  Bottom Layer w0.2: HDR2.26@24.5,16.5 v1(24.5,18)
LED0: HDR2.60 U1.D6 | length 18.1
  Top Layer w0.2: v1(34.5,32) U1.D6@35,32.5
  MidLayer2 w0.127: 34,30.5 34,31.5
  MidLayer2 w0.2: 34,30.5 34,27.8 34.3,27.5 34.3,23.3 38.1,19.5 v1(38.1,18) ; 34,31.5 v1(34.5,32)
  Bottom Layer w0.2: HDR2.60@38.1,16.5 v1(38.1,18)
LED1: HDR2.62 U1.K6 | length 26.9
  Top Layer w0.2: U1.K6@35,38.5 v1(35.5,38)
  MidLayer2 w0.127: 36,37.5 39,37.5
  MidLayer2 w0.2: v1(35.5,38) 36,37.5 ; 39,37.5 39.4,37.1 40.1,36.4 40.1,29.7 39.3,28.9 39.3,26 40,25.3 v1(40,22)
  Bottom Layer w0.2: HDR2.62@38.9,16.5 38.9,19.5 38.9,20.9 v1(40,22)
LED2: HDR2.64 U1.E4 | length 18.1
  Top Layer w0.2: U1.E4@37,33.5 v1(37.5,33)
  MidLayer3 w0.127: 38,30.5 38,32.5
  MidLayer3 w0.2: v1(37.5,33) 38,32.5 ; 38,30.5 38,29.6 38.7,28.9 38.7,25.5 39.4,24.8 39.4,20.7 39.6,20.5 39.7,20.4 v1(39.7,18)
  Bottom Layer w0.2: HDR2.64@39.7,16.5 v1(39.7,18)
LED3: HDR2.66 U1.F3 | length 19.9
  Top Layer w0.2: v1(37.5,34) U1.F3@38,34.5
  MidLayer2 w0.127: 38,30.5 38,33.5
  MidLayer2 w0.2: v1(37.5,34) 38,33.5 ; 38,30.5 38,30 37.4,29.4 37.4,26.7 39.3,24.8 39.3,21.3 40.5,20.1 v1(40.5,19.5)
  Bottom Layer w0.2: HDR2.66@40.5,16.5 v1(40.5,19.5)
LED4: HDR2.68 U1.F4 | length 20.5
  Top Layer w0.2: v1(36.5,34) U1.F4@37,34.5
  MidLayer2 w0.127: 37,30.5 37,33.5
  MidLayer2 w0.2: v1(36.5,34) 37,33.5 ; 37,30.5 37,25.9 38.1,24.8 38.1,21.7 39.7,20.1 39.7,19 40.7,18 v1(41.3,18)
  Bottom Layer w0.2: HDR2.68@41.3,16.5 v1(41.3,18)
LED5: HDR2.70 U1.D1 | length 17.8
  Top Layer w0.2: U1.D1@40,32.5 40.5,32.5 ; 40.4,32.5 40.634,32.5 42.7,30.434 42.7,20.1 v1(42.1,19.5)
  Bottom Layer w0.2: HDR2.70@42.1,16.5 v1(42.1,19.5)
LED6: HDR2.72 U1.E2 | length 19.5
  Top Layer w0.2: U1.E2@39,33.5 39.5,33 40.7,33 43.1,30.6 43.1,18.2 v1(42.9,18)
  Bottom Layer w0.2: HDR2.72@42.9,16.5 v1(42.9,18)
LED7: HDR2.74 U1.E1 | length 19
  Top Layer w0.2: U1.E1@40,33.5 40.8,33.5 43.5,30.8 43.5,19.7 v1(43.7,19.5)
  Bottom Layer w0.2: HDR2.74@43.7,16.5 v1(43.7,19.5)
MOUSECLOCK: HDR1.26 U1.U14 | length 28.9
  Top Layer w0.2: v1(26.5,46) U1.U14@27,45.5
  MidLayer2 w0.127: 27,46.5 27,50.5
  MidLayer2 w0.2: v1(24.5,70) 24.5,61.6 27.3,58.8 27.3,51.8 27,51.5 27,50.5 ; v1(26.5,46) 27,46.5
  Bottom Layer w0.2: HDR1.26@24.5,67.3 v1(24.5,70)
MOUSEDATA: HDR1.28 U1.W14 | length 24.9
  Top Layer w0.2: U1.W14@27,47.5 v1(27.5,48)
  MidLayer2 w0.127: 28,48.5 28,49.5
  MidLayer2 w0.2: v1(25.3,69) 25.3,61.7 27.9,59.1 27.9,50.7 28.2,50.4 28.2,49.7 28,49.5 ; v1(27.5,48) 28,48.5
  Bottom Layer w0.2: HDR1.28@25.3,67.3 v1(25.3,69)
N_VRIO_ERR: R26.2 U1.W5 | length 41.4
  Top Layer w0.2: v1(35.5,48) U1.W5@36,47.5
  MidLayer1 w0.127: 36,48.5 36,49.5
  MidLayer1 w0.2: v1(35.5,48) 36,48.5 ; 36,49.5 36,52.9 35.9,53 35.9,54.2 36.6,54.9 36.6,58 37.2,58.6 37.2,62.9 40.5,66.2 45,70.7 45,77.6 44.6,78 44.6,79.1 v1(45.2,79.7)
  Bottom Layer w0.2: v1(45.2,79.7) 47,81.5 R26.2@49.05,81.5
NC0: U1.W7
NetC32_2: C32.2 R10.2 U2.2 U2.15 | length 13.7
  Top Layer w0.3: C32.2@4.85,9.5 6.1,9.5 8.4,7.2 8.4,6.588 ; U2.2@6.4,6.588 13.462,6.588 R10.2@14.55,5.5
NetC64_2: C64.2 U6.6 | length 8.7
  Top Layer w0.38: U6.6@57.015,40.548 58.652,40.548 61.8,37.5 63.9,37.5 64.275,37.125 C64.2@64.3,37.1
NetC67_1: C67.1 U6.10 | length 3.7
  Top Layer w0.38: U6.10@62.984,39.913 64.167,39.913 64.354,40.1 C67.1@66.5,40.1 ; C67.1@66.413,39.913 C67.1@66.5,40
NetC80_2: C80.2 L3.1 U1.AA15 | length 7
  Top Layer w0.2: v1(25.5,50) U1.AA15@26,49.5
  Bottom Layer w0.3: C80.2@24.5,50.65 23.5,51.65 23.5,53.8 24.425,54.725 24.5,54.8 L3.1@24.5,54.65 ; C80.2@24.7,50.8 v1(25.5,50)
NetC81_2: C81.2 L2.1 U1.AA16 | length 7.9
  Top Layer w0.2: v1(24.5,49) U1.AA16@25,49.5
  Bottom Layer w0.3: C81.2@22.5,50.65 21.6,51.55 21.6,53.7 L2.1@22.5,54.6 ; C81.2@22.7,50.8 v1(24.5,49)
NetC82_2: C82.2 L5.1 U1.AA14 | length 7.1
  Top Layer w0.2: v1(26.5,49) U1.AA14@27,49.5
  Bottom Layer w0.3: v1(26.5,49) C82.2@26.5,50.6 ; C82.2@26.5,50.65 25.5,51.65 25.5,53.6 26.5,54.6 L5.1@26.5,54.65
NetC83_2: C83.2 L4.1 U1.AA13 | length 6.8
  Top Layer w0.2: v1(27.5,50) U1.AA13@28,49.5
  Bottom Layer w0.3: v1(27.5,50) 27.5,50.7 ; C83.2@28.5,50.65 27.5,50.7 ; L4.1@28.5,54.65 28.45,54.65 27.5,53.7 27.5,50.7
NetC84_2: C84.2 L8.1 U1.AA7 | length 8.2
  Top Layer w0.2: U1.AA7@34,49.5 v1(34.5,49)
  Bottom Layer w0.3: v1(34.5,49) 35.5,50 35.5,50.6 ; C84.2@36.5,50.65 35.5,50.6 ; L8.1@36.5,54.65 36.5,54.5 35.5,53.5 35.5,50.6
NetC85_2: C85.2 L9.1 U1.AA8 | length 7.8
  Top Layer w0.2: U1.AA8@33,49.5 v1(33.5,50)
  Bottom Layer w0.3: v1(33.5,50) 33.5,50.7 ; L9.1@34.5,54.65 34.5,54.5 33.5,53.5 33.5,50.7 ; 33.5,50.7 33.55,50.65 C85.2@34.5,50.65 33.5,50.7
NetC86_2: C86.2 L6.1 U1.AA10 | length 7.4
  Top Layer w0.2: v1(30.5,49) U1.AA10@31,49.5
  Bottom Layer w0.3: v1(30.5,49) C86.2@30.5,50.65 29.4,51.75 29.4,53.7 30.4,54.7 L6.1@30.5,54.7
NetC87_2: C87.2 L7.1 U1.AA9 | length 7.8
  Top Layer w0.2: v1(31.5,50) U1.AA9@32,49.5
  Bottom Layer w0.3: v1(31.5,50) 31.5,50.7 ; C87.2@32.4,50.7 31.6,50.7 31.597,50.703 ; C87.2@32.5,50.65 32.425,50.725 31.597,50.703 ; L7.1@32.5,54.65 32.45,54.65 31.5,53.7 31.5,50.8 ; 31.5,50.7 31.5,50.8 ; 31.5,50.7 31.597,50.703 ; 31.5,50.8 31.597,50.703
NetC94_1: C94.1 U8.1 | length 2.6
  Bottom Layer w0.5: U8.1@58.1,78.905 C94.1@58.1,81.5
NetHDR1_56: HDR1.56 R1.2 | length 10.1
  Bottom Layer w0.2: R1.2@32.5,75 32.6,75 33.8,73.8 33.8,71.1 33.97,70.93 34.1,70.8 35.3,70.8 36.5,69.6 HDR1.56@36.5,67.3
NetHDR1_58: HDR1.58 R2.2 | length 5.7
  Bottom Layer w0.2: R2.2@35,72.05 35,71.8 37.3,69.5 HDR1.58@37.3,67.3
NetHDR1_60: HDR1.60 R3.2 | length 9.8
  Bottom Layer w0.2: R3.2@35.5,76.05 35.5,75.6 36.8,74.3 36.8,70.9 38.1,69.6 HDR1.60@38.1,67.3
NetHDR1_74: HDR1.74 R4.2 | length 4.3
  Bottom Layer w0.2: R4.2@43,71.05 R4.2@43.5,71.05 43.5,69.1 43.7,68.9 HDR1.74@43.7,67.3
NetHDR1_76: HDR1.76 R5.2 | length 8.1
  Bottom Layer w0.2: HDR1.76@44.5,67.3 44.5,69.4 44.8,69.7 44.8,73.5 45.5,74.3 R5.2@45.5,75.05
NetHDR1_86: HDR1.86 R6.2 | length 3.7
  Bottom Layer w0.2: HDR1.86@48.5,67.3 R6.2@48.5,71.05
NetL1_1: L1.1 U6.1 U6.3 U6.14 U6.16 | length 36.8
  Top Layer w0.38: U6.3@57.015,42.453 58.053,42.453 ; U6.1@57.015,43.723 U6.1@57.723,43.723 ; 58.3,43.4 57.977,43.723 ; 58.3,44.3 U6.1@57.723,43.723 ; 58.5,42.9 58.053,42.453 ; 61.4,43 61.947,42.453 ; 61.5,43.2 62.022,43.723 ; 61.5,44.4 U6.16@62.177,43.723 ; U6.14@62.984,42.453 61.947,42.453 ; U6.16@62.984,43.723 U6.16@62.177,43.723 ; U6.1@57.723,43.723 57.977,43.723 ; 57.977,43.723 59,43.723 60,43.723 61,43.723 62.022,43.723 ; 58.053,42.453 59.5,42.453 60.5,42.453 61.947,42.453 ; 62.022,43.723 U6.16@62.177,43.723
  Bottom Layer w1.5: v4(60,43.5) 60,44.548 60,48 62,50 L1.1@65,50 ; v4(60.5,42.5) 60.5,43.5 v4(60.5,44.548) 60.5,47.5 62,49 L1.1@64,49 ; 62,51 L1.1@63,51
  other v4: 59.5,42.5 59,43.5 61,43.5 59.5,44.548
NetLED1_1: LED1.1 R19.1 | length 2.1
  Top Layer w0.4: R19.1@46.5,5.5 LED1.1@48.55,5.5 LED1.1@48.6,5.5
NetLED2_1: LED2.1 R20.1 | length 4
  Top Layer w0.3: LED2.1@18.55,5.5 18.5,5.5 18.512,5.479 18.513,5.476 19.4,4.1 19.9,4.1 20.4,3.6 R20.1@20.4,2.5
NetLED2_2: LED2.2 U5.4 | length 3.4
  Top Layer w0.3: LED2.2@20.45,5.5 22,5.5 22.941,6.441 U5.4@23.42,6.441
NetR22_2: R22.2 U6.7 | length 2.8
  Top Layer w0.38: U6.7@57.015,39.913 57.987,39.913 v1(58.4,39.8)
  Bottom Layer w0.4: v1(58.4,39.8) 59,39.2 R22.2@59,38.6
NetR23_2: R23.2 R24.2 R25.1 U7.1 | length 10.2
  Bottom Layer w0.4: U7.1@18.5,79.04 21.14,79.04 22.6,80.5 R25.1@23.05,80.5 R23.2@23.05,85.5
NetR26_1: R26.1 R27.1 U8.7 | length 7.5
  Bottom Layer w0.5: R26.1@50.95,81.5 R26.1@51.1,81.5 ; U8.7@52.9,77.635 51.565,77.635 51.1,78.1 R26.1@51.1,81.5 ; R27.1@53.05,81.5 R26.1@51.1,81.5
NEXUS_TCK: HDR1.82 U1.W11 | length 40.4
  Top Layer w0.2: U1.W11@30,47.5 v1(30.5,47)
  MidLayer2 w0.127: 31,47.5 31.9,47.5 32,47.6 32,49.5
  MidLayer2 w0.2: v1(30.5,47) 31,47.5 ; 32,49.5 33.1,50.6 34.9,50.6 35.7,49.8 41.3,49.8 47.9,56.4 47.9,58.2 48.3,58.6 48.3,69.1 v1(47.6,69.8)
  Bottom Layer w0.2: HDR1.82@46.9,67.3 46.9,69.1 v1(47.6,69.8)
NEXUS_TDI: HDR1.84 U1.Y11 | length 37.3
  Top Layer w0.2: U1.Y11@30,48.5 v1(30.5,48)
  MidLayer2 w0.127: 31,48.5 31,49.5
  MidLayer2 w0.2: v1(30.5,48) 31,48.5 ; 31,49.5 30.8,49.7 30.8,50.3 31.5,51 35.1,51 35.9,50.2 41.134,50.2 46,55.066 46,58 47.1,59.1 47.1,64.1 47.7,64.7 v1(47.7,68.9)
  Bottom Layer w0.2: HDR1.84@47.7,67.3 v1(47.7,68.9)
NEXUS_TDO: R5.1 U1.AB2 | length 32.9
  Top Layer w0.2: U1.AB2@39,50.5 38.9,50.6 38.9,51.3 39.2,51.6 40.5,51.6 42.7,53.8 42.7,56.4 v1(43.3,57)
  MidLayer1 w0.2: v1(43.3,57) 43.1,57.2 43.1,58.1 43.6,58.6 43.6,68.4 45.5,70.3 v1(45.5,78.3)
  Bottom Layer w0.4: R5.1@45.5,76.95 v1(45.5,78.3)
NEXUS_TMS: HDR1.80 U1.V12 | length 36.2
  Top Layer w0.2: U1.V12@29,46.5 v1(29.5,47)
  MidLayer2 w0.127: 30,47.5 30,49.5
  MidLayer2 w0.2: v1(29.5,47) 30,47.5 ; 30,49.5 30,50.1 31.5,51.6 40.2,51.6 40.9,52.3 40.9,53.3 44.5,56.9 44.5,58 45.3,58.8 45.3,59.6 46.1,60.4 v1(46.1,68.9)
  Bottom Layer w0.2: HDR1.80@46.1,67.3 v1(46.1,68.9)
RAM0_DATA0: HDR2.42 U1.D10 | length 18.3
  Top Layer w0.2: v1(30.5,32) U1.D10@31,32.5
  MidLayer2 w0.127: 30,30.5 30,31.5
  MidLayer2 w0.2: 30,30.5 30,29.8 29.5,29.3 29.5,28 30.4,27.1 30.4,25.1 31.5,24 31.5,21.6 31.7,21.4 31.7,20.3 31.9,20.1 31.9,18.5 31.4,18 v1(30.9,18) ; 30,31.5 v1(30.5,32)
  Bottom Layer w0.2: HDR2.42@30.9,16.5 v1(30.9,18)
RAM0_DATA1: HDR2.40 U1.B11 | length 14.6
  Top Layer w0.2: U1.B11@30,30.5 29.5,30 29.5,28.1 29.7,27.9 29.7,19.9 v1(30.3,19.3)
  Bottom Layer w0.2: HDR2.40@30.1,16.5 30.1,18.2 30.3,18.4 v1(30.3,19.3)
RAM0_DATA2: HDR2.38 U1.B12 | length 15
  Top Layer w0.2: U1.B12@29,30.5 28.5,30 28.5,28.1 28.3,27.9 28.3,26.3 29.3,25.3 29.3,19.5 29.7,19.1 29.7,18.4 v1(29.3,18)
  Bottom Layer w0.2: HDR2.38@29.3,16.5 v1(29.3,18)
RAM0_DATA3: HDR2.36 U1.E13 | length 17.6
  Top Layer w0.2: v1(27.5,33) U1.E13@28,33.5
  MidLayer3 w0.127: 28,30.5 28,32.5
  MidLayer3 w0.2: v1(27.5,33) 28,32.5 ; 28,30.5 28,21 28.5,20.5 v1(28.5,19.5)
  Bottom Layer w0.2: HDR2.36@28.5,16.5 v1(28.5,19.5)
RAM0_DATA4: HDR2.34 U1.D13 | length 16.8
  Top Layer w0.2: v1(27.5,32) U1.D13@28,32.5
  MidLayer2 w0.127: 27,30.5 27,31.5
  MidLayer2 w0.2: 27,30.5 27.5,30 27.5,24.8 27.7,24.6 27.7,21 27.9,20.8 27.9,18.3 27.7,18.1 v1(27.7,18) ; 27,31.5 v1(27.5,32)
  Bottom Layer w0.2: HDR2.34@27.7,16.6 v1(27.7,18)
RAM0_DATA5: HDR2.32 U1.F14 | length 18.5
  Top Layer w0.2: U1.F14@27,34.5 v1(27.5,34)
  MidLayer4 w0.127: 27,30.5 27,33.5
  MidLayer4 w0.2: v1(26.9,19.5) 26.9,20.3 27,20.4 27,30.5 ; 27,33.5 v1(27.5,34)
  Bottom Layer w0.2: HDR2.32@26.9,16.5 v1(26.9,19.5)
RAM0_DATA6: HDR2.30 U1.C13 | length 16
  Top Layer w0.2: v1(27.5,31) U1.C13@28,31.5
  MidLayer1 w0.2: v1(26.1,18) 26.4,18 27.5,19.1 v1(27.5,31)
  Bottom Layer w0.2: HDR2.30@26.1,16.5 v1(26.1,18)
RAM0_DATA7: HDR2.28 U1.C15 | length 15.4
  Top Layer w0.2: v1(25.5,31) U1.C15@26,31.5
  MidLayer1 w0.2: v1(25.3,19.5) 25.3,19.9 25.2,20 25.2,22.9 25.5,23.2 v1(25.5,31)
  Bottom Layer w0.2: HDR2.28@25.3,16.5 v1(25.3,19.5)
RAM0_OE: HDR1.41 U1.U10 | length 16.1
  Top Layer w0.2: U1.U10@31,45.5 v1(31.5,46)
  MidLayer1 w0.127: 32,46.5 32,50.5
  MidLayer1 w0.2: v1(30.6,58.9) 31.4,58.1 31.4,52.9 32,52.3 32,50.5 ; v1(31.5,46) 32,46.5
  Bottom Layer w0.2: v1(30.6,58.9) 30.9,59.2 HDR1.41@30.9,60.5
RAM0_WE: HDR1.79 U1.W1 | length 16.9
  Top Layer w0.2: U1.W1@40,47.5 42.4,47.5 43.3,48.4 v1(43.3,50.4)
  MidLayer1 w0.2: v1(43.3,50.4) 43.3,52.9 45.9,55.5 45.9,57.5 46.1,57.7 v1(46.1,58.9)
  Bottom Layer w0.2: v1(46.1,58.9) HDR1.79@46.1,60.5
RAM1_DATA0: HDR1.45 U1.V10 | length 17.3
  Top Layer w0.2: U1.V10@31,46.5 v1(31.5,47)
  MidLayer3 w0.127: 31,47.5 31,50.5
  MidLayer3 w0.2: v1(29.4,57.2) 29.4,57 31,55.4 31,50.5 ; 31,47.5 v1(31.5,47)
  MidLayer4 w0.2: v1(29.4,57.2) 29.8,57.5 30.5,58.2 32,58.2 32.6,58.8 v1(32.6,58.9)
  Bottom Layer w0.2: HDR1.45@32.5,60.5 32.5,59.1 v1(32.6,58.9)
RAM1_DATA1: HDR1.49 U1.Y8 | length 15.2
  Top Layer w0.2: U1.Y8@33,48.5 v1(33.5,48)
  MidLayer1 w0.127: 34,48.5 34.9,48.5 35,48.6 35,49.5
  MidLayer1 w0.2: v1@33.5,48.1 v1(33.5,48) 34,48.5 ; v1(34.5,57.4) 34.5,56.1 35.5,55.1 35.5,50 35,49.5
  Bottom Layer w0.2: HDR1.49@34.1,60.5 34.1,58 v1(34.5,57.4)
RAM1_DATA2: HDR1.53 U1.N6 | length 22.6
  Top Layer w0.2: U1.N6@35,41.5 v1(35.5,41)
  MidLayer3 w0.127: 35,41.5 35,42.5 ; 37,46.4 37,47.8 37.997,48.797 37.997,49.497
  MidLayer3 w0.2: 35,41.5 v1(35.5,41) ; 35,42.5 35.5,43 35.5,44.9 37,46.4 ; v1(35.7,57.6) 35.7,57.1 37.5,55.3 37.5,50 38,49.5
  Bottom Layer w0.2: v1(35.7,57.6) HDR1.53@35.7,60.5
RAM1_DATA3: HDR1.57 U1.V4 | length 15.1
  Top Layer w0.2: U1.V4@37,46.5 v1(37.5,47)
  MidLayer1 w0.2: v1(37.3,57.7) 37.3,55.5 38.3,54.5 38.3,48.8 37.5,48 v1(37.5,47)
  Bottom Layer w0.2: v1@37.3,57.6 v1(37.3,57.7) HDR1.57@37.3,60.5
RAM1_DATA4: HDR1.55 U1.M6 | length 26.1
  Top Layer w0.2: U1.M6@35,40.5 v1(35.5,40)
  MidLayer3 w0.127: 36,40.5 36,42.3 36.2,42.5 39,42.5
  MidLayer3 w0.2: v1(35.5,40) 36,40.5 ; v1(36.5,58.9) 36.5,58.3 36.3,58.1 36.3,57.2 37.9,55.6 37.9,50.166 38.366,49.7 38.4,49.7 38.4,48.686 37.9,48.186 37.9,47.7 39.2,46.4 39.2,42.7 39,42.5
  Bottom Layer w0.2: v1(36.5,58.9) HDR1.55@36.5,60.5
RAM1_DATA5: HDR1.51 U1.V8 | length 19.2
  Top Layer w0.2: U1.V8@33,46.5 v1(33.5,46)
  MidLayer3 w0.127: 34,46.5 34.9,46.5 35,46.6 35,47.4 35.1,47.5 35.9,47.5 36,47.6 36,48.4 36.1,48.5 36.9,48.5 37,48.6 37,49.5
  MidLayer3 w0.2: v1(33.5,46) 34,46.5 ; v1(35.1,58.3) 35.1,56.9 34.9,56.7 34.9,56 35.661,55.239 35.661,52.339 37,51 37,49.5
  Bottom Layer w0.2: HDR1.51@34.9,60.5 34.9,58.5 v1(35.1,58.3)
RAM1_DATA6: HDR1.47 U1.V9 | length 15
  Top Layer w0.2: U1.V9@32,46.5 v1(32.5,47)
  MidLayer1 w0.127: 33,47.5 33,50.5
  MidLayer1 w0.2: v1(32.5,47) 33,47.5 ; v1(32.6,57.5) 32.6,56.6 33.1,56.1 33.1,52.7 33,52.6 33,50.5
  Bottom Layer w0.2: v1(32.6,57.5) 33.3,58.2 HDR1.47@33.3,60.5
RAM1_DATA7: HDR1.43 U1.W10 | length 14
  Top Layer w0.2: U1.W10@31,47.5 v1(31.5,48)
  MidLayer1 w0.127: 31,48.5 31,50.5
  MidLayer1 w0.2: v1(30.6,57.4) 30.6,54.5 31,54.1 31,50.5 ; 31,48.5 v1(31.5,48)
  Bottom Layer w0.2: v1(30.6,57.4) 31.7,58.7 HDR1.43@31.7,60.5
RAM1_OE: HDR1.39 U1.AA11 | length 12
  Top Layer w0.2: v1(29.7,58.2) 30,57.9 30,56.9 30.239,56.661 30.239,54.261 30.7,53.8 30.8,53.7 30.8,53 30.5,52.7 30.5,50 U1.AA11@30,49.5
  Bottom Layer w0.2: v1(29.7,58.2) 29.952,58.452 29.952,59.352 30.1,59.5 HDR1.39@30.1,60.5
RAM1_WE: HDR1.61 U1.M4 | length 24
  Top Layer w0.2: U1.M4@37,40.5 v1(37.5,40)
  MidLayer3 w0.127: 38,40.5 39,40.5
  MidLayer3 w0.2: v1(37.5,40) 38,40.5 ; v1(38.9,57.7) 39.386,57.214 39.686,57.214 40.7,56.2 40.7,42.2 39,40.5
  Bottom Layer w0.2: v1(38.9,57.7) HDR1.61@38.9,60.5
RAM_ADDR0: HDR1.21 U1.Y16 | length 14.6
  Top Layer w0.2: U1.Y16@25,48.5 v1(25.5,48)
  MidLayer1 w0.127: 25,48.5 25,49.5
  MidLayer1 w0.2: v1(23.7,58) 23.7,56.9 24.8,55.8 24.8,49.7 25,49.5 ; 25,48.5 v1(25.5,48)
  Bottom Layer w0.2: HDR1.21@22.9,60.5 22.9,58.3 23.2,58 v1(23.7,58)
RAM_ADDR1: HDR1.25 U1.Y15 | length 13.3
  Top Layer w0.2: v1(25.5,49) U1.Y15@26,48.5
  MidLayer2 w0.2: v1(24.3,57.4) 25.7,56 25.7,51 26.086,50.614 26.086,49.586 v1(25.5,49)
  Bottom Layer w0.2: v1(24.3,57.4) 24.5,57.5 HDR1.25@24.5,60.5
RAM_ADDR2: HDR1.29 U1.V13 | length 16.2
  Top Layer w0.2: U1.V13@28,46.5 v1(28.5,47)
  MidLayer3 w0.127: 28,47.5 28,49.5
  MidLayer3 w0.2: v1(25.9,58) 27,58 27.6,57.4 27.6,53.4 28.2,52.8 28.2,49.7 28,49.5 ; 28,47.5 v1(28.5,47)
  Bottom Layer w0.2: v1(25.9,58) 25.9,59.1 26.1,59.3 HDR1.29@26.1,60.5
RAM_ADDR3: HDR1.33 U1.Y13 | length 13.6
  Top Layer w0.2: v1(27.5,49) U1.Y13@28,48.5
  MidLayer1 w0.2: v1(26.5,57.4) 27.2,56.7 27.2,51.4 28.1,50.5 28.1,49.6 v1(27.5,49)
  Bottom Layer w0.2: v1(26.5,57.4) 27.7,58.6 HDR1.33@27.7,60.5
RAM_ADDR4: HDR1.65 U1.M3 | length 22.1
  Top Layer w0.2: U1.M3@38,40.5 v1(38.5,40)
  MidLayer1 w0.2: v1(38.5,40) 40.5,42 v1(40.5,57.3)
  Bottom Layer w0.2: v1(40.5,57.3) HDR1.65@40.5,60.5 HDR1.65@40.5,60.6
RAM_ADDR5: HDR1.69 U1.W2 | length 16.4
  Top Layer w0.2: U1.W2@39,47.5 39.5,48 41.1,48 41.2,48.1 v1(42.1,48.1)
  MidLayer1 w0.2: v1(42.1,48.1) 41.3,48.9 41.3,56.9 v1(42.1,57.7)
  Bottom Layer w0.2: v1(42.1,57.7) HDR1.69@42.1,60.5
RAM_ADDR6: HDR1.73 U1.AA1 | length 12.8
  Top Layer w0.2: U1.AA1@40,49.5 43.2,52.7 43.2,55.8 44,56.6 44,57.4 v1(43.7,57.7)
  Bottom Layer w0.2: v1(43.7,57.7) HDR1.73@43.7,60.5
RAM_ADDR7: HDR1.77 U1.V2 | length 21.9
  Top Layer w0.2: U1.V2@39,46.5 39.5,46 43.7,46 43.9,46.2 v1(44.4,46.2)
  MidLayer1 w0.2: v1(44.4,46.2) 43.7,46.9 43.7,47 43.2,47.5 43.2,49.6 42.5,50.3 42.5,54.9 v1(45.3,57.7)
  Bottom Layer w0.2: v1(45.3,57.7) HDR1.77@45.3,60.5
RAM_ADDR8: HDR1.75 U1.Y2 | length 15.6
  Top Layer w0.2: U1.Y2@39,48.5 39.5,49 40.3,49 45.5,54.2 45.5,56 44.5,57 v1(44.5,58.9)
  Bottom Layer w0.2: v1(44.5,58.9) HDR1.75@44.5,60.5
RAM_ADDR9: HDR1.71 U1.V3 | length 19.1
  Top Layer w0.2: U1.V3@38,46.5 38.5,47 v1(42.8,47)
  MidLayer1 w0.2: v1(42.8,47) 42.8,49.3 42.1,50 42.1,55.9 42.7,56.5 42.7,58.7 v1(42.9,58.9)
  Bottom Layer w0.2: v1(42.9,58.9) HDR1.71@42.9,60.5
RAM_ADDR10: HDR1.67 U1.L3 | length 25.4
  Top Layer w0.2: U1.L3@38,39.5 v1(38.5,39)
  MidLayer3 w0.2: v1(38.5,39) 39.2,38.3 39.9,38.3 40.3,38.7 40.3,39.4 40.8,39.9 40.9,39.9 41.5,40.5 41.5,58.2 41.3,58.4 v1(41.3,58.9)
  Bottom Layer w0.2: v1(41.3,58.9) HDR1.67@41.3,60.5
RAM_ADDR11: HDR1.63 U1.L4 | length 25.2
  Top Layer w0.2: U1.L4@37,39.5 v1(37.5,39)
  MidLayer3 w0.127: 38,39.5 39,39.5
  MidLayer3 w0.2: v1(37.5,39) 38,39.5 ; 39,39.5 39.4,39.9 39.4,40.2 41.1,41.9 41.1,58 40.2,58.9 v1(39.7,58.9)
  Bottom Layer w0.2: v1(39.7,58.9) HDR1.63@39.7,60.5
RAM_ADDR12: HDR1.59 U1.M5 | length 25.1
  Top Layer w0.2: U1.M5@36,40.5 v1(36.5,40)
  MidLayer3 w0.127: 37,40.5 37,41.4 37.1,41.5 39,41.5
  MidLayer3 w0.2: v1(36.5,40) 37,40.5 ; v1(38.1,58.9) 38.1,57.7 39,56.8 39.534,56.8 40.3,56.034 40.3,42.8 39,41.5
  Bottom Layer w0.2: v1(38.1,58.9) HDR1.59@38.1,60.5